# Altium PCB dummy.PcbDoc
Units mil, origin at the board's own origin, x right, y up, seen from the top; angles counter-clockwise.
Board outline 6000 x 4000 mil, 2 copper layers (Top Layer, Bottom Layer); 57 components, 23 nets, 4 pads, 0 vias.
Unrouted connection lines stored in the file: 1.
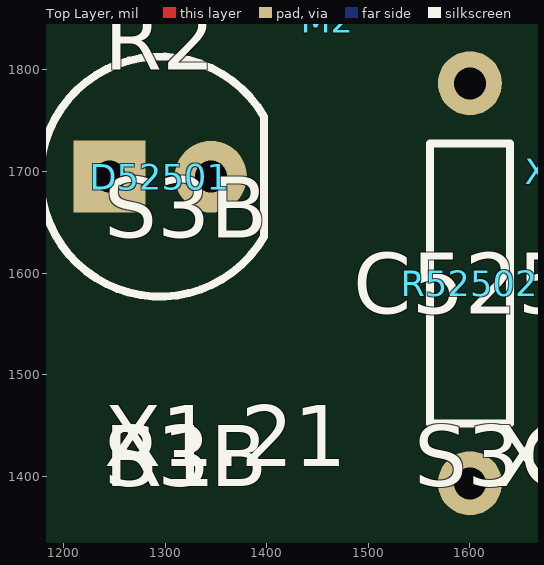
[diagram p0: Top Layer view]
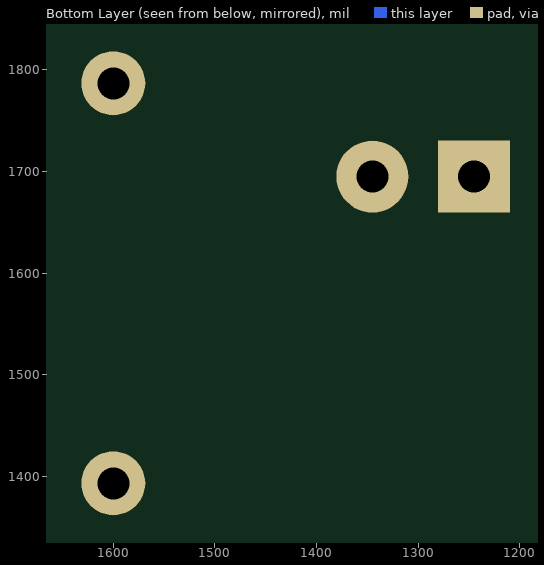
[diagram p1: Bottom Layer view, seen from below]

## Layer stack, top to bottom
Top Solder: solder mask 0.4, Solder Resist, Dk 3.5
Top Layer: signal copper 1.4
Dielectric 1: dielectric 12.6, FR-4, Dk 4.8
Bottom Layer: signal copper 1.4
Bottom Solder: solder mask 0.4, Solder Resist, Dk 3.5

## Board outline
1000,1000 7000,1000 7000,5000 1000,5000

## Design rules (kind name [scope] priority, off if disabled: settings)
Clearance [All] p1: gap=10 ignorepadtopadclearanceinfootprint=FALSE except(0: Arc-Hole Track-Hole SMDPad-Hole THPad-Hole Via-Hole Fill-Hole Poly-Hole Region-Hole Text-Hole)
PolygonConnect [All] p1: connectstyle=Relief reliefconductorwidth=10 reliefentries=4 polygonreliefangle="90 Angle" airgapwidth=10
RoomDefinition TK525_Kraftforsyning [InComponentClass('TK525_Kraftforsyning')] p1: confinementstyle=ConfineIn formatcopy=TRUE lockcomponents=FALSE outline 895,1165 7460,1165 7460,5360 895,5360
RoomDefinition TK525_2 [InComponentClass('TK525_2')] p2: confinementstyle=ConfineIn formatcopy=TRUE lockcomponents=FALSE outline 0,0 7550,0 7550,5565 0,5565
RoomDefinition TK525_1 [InComponentClass('TK525_1')] p3: confinementstyle=ConfineIn formatcopy=TRUE lockcomponents=FALSE outline 0,0 7580,0 7580,5585 0,5585
RoutingVias [All] p1: holewidth=28 width=50 viastyle="Through Hole" minholewidth=28 minwidth=50 maxholewidth=28 maxwidth=50
SolderMaskExpansion [All] p1: expansion=4 istentingtop=FALSE
Width [All] p1: maxlimit=10 minlimit=10 preferedwidth=10
30 further rules are at their usual default settings.

## Classes and differential pairs
component class TK525_Kraftforsyning: F1 K1 K2 K52501 L52500 L52501 M1 M2 M3 M4 M5 M6 M7 M? S1 S2 S3 S4 S4B S5 S5B X1.1 X1.2 X1.3 X1.4 X1.5 X1.6 X1.7 X1.8 X1.11 X1.12 X1.13 X1.14 X1.15 X1.16 X1.17 X1.18
component class TK525_2: C52500 D52500 D52501 L52501 R2 R52502 S3B
component class TK525_1: R1 S3 S3B S3C X1.9 X1.10 X1.19 X1.20 X1.21 X1.22 X1.26 X1.27

## Components (designator, comment, footprint, x,y, rotation, side; value= is the part's Value field where it differs from the comment)
C52500 "MAL209636222E3" dummy 1480,1525 r90 top
D52500 "GBJ2504" dummy 1965,1525 r90 top
D52501 "LED Rød" LED254W7L870D500 1295,1695 r0 top
F1 "Automatsikring" dummy 1705,2185 r90 top
K1 "DIN-Rele 5V" dummy 1480,2185 r90 top
K2 "Kontaktor" dummy 1235,2170 r90 top
K52501 "DIN-Rele 5V" dummy 1930,1950 r90 top
L52501 "Skilletrafo 2:1" dummy 2450,1545 r90 top
M1 "Lask til 2.5mm2 Rekkeklemme 10way" dummy 1235,1865 r90 top
M2 "Lask til 2.5mm2 Rekkeklemme 10way" dummy 1460,1850 r90 top
M3 "Automasjonsbryter holder" dummy 2215,1905 r90 top
M4 "Automasjonsbryter holder" dummy 1480,1905 r90 top
M5 "Automasjonsbryter holder" dummy 1725,1905 r90 top
M6 "Automasjonsbryter holder" dummy 1970,1905 r90 top
M7 "Automasjonsbryter holder" dummy 1235,1905 r90 top
R1 "100R" dummy 1235,1355 r90 top
R2 "100R" dummy 1235,1765 r90 top
R52502 "16k" RESA_0.25W 1600,1590 r90 top
S1 "Automasjonsvelger Grønn" dummy 4045,1920 r90 top
S1 "Automasjonsbryter NO" dummy 4270,1920 r90 top
S2 "Automasjonsbryter NC" dummy 3315,1905 r90 top
S2 "Automasjonsvelger Rød" dummy 3070,1905 r90 top
S3 "Automasjonsbryter NO" dummy 3785,1915 r90 top
S3 "Automasjonsvelger Grønn" dummy 3555,1905 r90 top
S3B "Automasjonsbryter NO" dummy 1235,1355 r90 top
S3B "Automasjonsbryter NC" dummy 1235,1600 r90 top
S3C "Automasjonsbryter NO" dummy 1540,1355 r90 top
S4 "Automasjonsbryter NC" dummy 4495,1905 r90 top
S4 "Automasjonsvelger Nødstopp" dummy 4985,1905 r90 top
S4B "Automasjonsbryter NC" dummy 2460,1845 r90 top
S5 "Automasjonsvelger Vrider bistabil" dummy 5230,1905 r90 top
S5 "Automasjonsbryter NC" dummy 4740,1905 r90 top
S5B "Automasjonsbryter NC" dummy 2765,1845 r90 top
X1.1 "Rekkeklemme 2.5mm2" dummy 4660,1280 r90 top
X1.2 "Rekkeklemme 2.5mm2" dummy 4985,1260 r90 top
X1.3 "Rekkeklemme 2.5mm2" dummy 5330,1260 r90 top
X1.4 "Rekkeklemme 2.5mm2" dummy 5675,1260 r90 top
X1.5 "Rekkeklemme 2.5mm2" dummy 3580,1750 r90 top
X1.6 "Rekkeklemme 2.5mm2" dummy 2840,1750 r90 top
X1.7 "Rekkeklemme 2.5mm2" dummy 2100,1750 r90 top
X1.8 "Rekkeklemme 2.5mm2" dummy 6020,1260 r90 top
X1.9 "Rekkeklemme 2.5mm2" dummy 2835,1415 r90 top
X1.10 "Rekkeklemme 2.5mm2" dummy 3575,1365 r90 top
X1.11 "Rekkeklemme 2.5mm2" dummy 3925,1720 r90 top
X1.12 "Rekkeklemme 2.5mm2" dummy 4295,1700 r90 top
X1.13 "Rekkeklemme 2.5mm2" dummy 4690,1700 r90 top
X1.14 "Rekkeklemme 2.5mm2" dummy 5085,1700 r90 top
X1.15 "Rekkeklemme 2.5mm2" dummy 3185,1700 r90 top
X1.16 "Rekkeklemme 2.5mm2" dummy 2445,1700 r90 top
X1.17 "Rekkeklemme 2.5mm2" dummy 1705,1700 r90 top
X1.18 "Rekkeklemme 2.5mm2" dummy 5480,1700 r90 top
X1.19 "Rekkeklemme 2.5mm2" dummy 3180,1365 r90 top
X1.20 "Rekkeklemme 2.5mm2" dummy 3970,1355 r90 top
X1.21 "Rekkeklemme 2.5mm2" dummy 1235,1375 r90 top
X1.22 "Rekkeklemme 2.5mm2" dummy 2025,1355 r90 top
X1.26 "Rekkeklemme 2.5mm2" dummy 1620,1355 r90 top
X1.27 "Rekkeklemme 2.5mm2" dummy 2430,1355 r90 top

## Footprints (in the part's own frame and the unit in brackets; to place one, negate y for a bottom-side part, rotate by r counter-clockwise, add the part's x,y. Pads: shape width x height; smd on the part's side, far side on the other; paste and mask are expansions set on the pad)
dummy [mil] "Dummy footprint for components that are not on the PCB for BOM to be correct"
LED254W7L870D500 [mm] "5mm LED, 8.7mm høy, 2.54mm pitch"
  rect 1.8x1.8 hole 0.8: 1(-1.27,0)
  round 1.8 hole 0.8: 2(1.27,0)
  silkscreen extent -3,-3 2.6,3, body extent -3,-3 2.5,3, height 8.9
RESA_0.25W [mm]
  round 1.6 hole 0.8: 1(-5,0) 2(5,0)
  silkscreen extent -3.5,-1 3.5,1, body extent -5.4,-1.2 5.4,1.2, height 2.6

## Part data
C52500: library part 3076, "CAP, ALU ELEC, 2200UF, 400V", id=3076, komponenttype=2, leverandor=Farnell, leverandor_varenr=2342176, navn=MAL209636222E3, nokkelord="Capacitor, Kondensator", pakke_opprettet="02/11/2021 00:12:53", pakke_opprettet_av=815, pakketype=TH, pris=340, produsent=Vishay, symbol_opprettet="28/06/2014 15:26:13", symbol_opprettet_av=815
D52500: library part 3322, "diodebro/Likeretterbro 400V 25A", antall=43, dybde=0, hylle=7, id=3322, komponenttype=9, lager_type=Baklager, leverandor=Farnell, leverandor_varenr=1651042, navn=GBJ2504, nokkelord="bro, diodebro, bridge", pakke_opprettet="02/11/2021 00:12:53", pakke_opprettet_av=815, pakketype=TH, pris=16, rad=7, rom=OV, symbol_opprettet="09/06/2015 22:09:39", symbol_opprettet_av=815
D52501: library part 3117, "Farget LED, 5mm", antall=59, dybde=0, hylle=4, id=3117, komponenttype=9, lager_type=Fremlager, navn="LED Rød", nokkelord="LED, rød, red, 5mm, diode, lys, light,  led 5mm", pakke_opprettet="09/02/2016 18:21:00", pakke_opprettet_av=1366, pakketype=-, pris=1, produsent=-, rad=6, rom=OV, symbol_opprettet="06/07/2014 18:59:47", symbol_opprettet_av=815
F1: library part 2977, "2-Pol", id=2977, leverandor=Farnell, leverandor_varenr=2492800, navn=Automatsikring, nokkelord="Sikring, Fuse", pakke_opprettet="02/11/2021 00:12:53", pakke_opprettet_av=815, pakketype=DIN, pris=362, produsent=ABB, symbol_opprettet="05/07/2015 13:21:53", symbol_opprettet_av=815
K1 K52501: library part 3272, "Coil: 5VDC, Contact: 250VAC 6A, DIN mount", id=3272, leverandor=Farnell, leverandor_varenr=1895933, navn="DIN-Rele 5V", pakke_opprettet="02/11/2021 00:12:53", pakke_opprettet_av=815, pakketype=-, pris=310, produsent=ABB, symbol_opprettet="04/07/2015 12:23:41", symbol_opprettet_av=815
K2: library part 2948, "Industriellt rele", id=2948, leverandor=Farnell, leverandor_varenr=9940480, navn=Kontaktor, nokkelord=Contactor, pakke_opprettet="02/11/2021 00:12:53", pakke_opprettet_av=815, pakketype=-, pris=300, produsent=IMO, symbol_opprettet="04/07/2015 12:23:41", symbol_opprettet_av=815
L52501: library part 3842, "Skilletrafo Ringkjerne", antall=40, dybde=0, hylle=2, id=3842, kolonne=4, komponenttype=3, lager_type=Fremlager, leverandor=Farnell, leverandor_varenr=2546942, navn="Skilletrafo 2:1", nokkelord="Trafo, transformer", pakke_opprettet="02/11/2021 00:12:53", pakke_opprettet_av=815, pakketype=-, pris=1900, produsent=Hammond, rad=4, rom=OV, symbol_opprettet="30/04/2016 00:07:18", symbol_opprettet_av=815
M1 M2: library part 3273, "Jumper (Busbar), Cross Jumper, DIN Rail Screw Clamp Terminal Blocks, 10 Ways", id=3273, leverandor=Farnell, leverandor_varenr=2061384, navn="Lask til 2.5mm2 Rekkeklemme 10way", pakke_opprettet="02/11/2021 00:12:53", pakke_opprettet_av=815, pakketype=-, pris=17, produsent=Multicomp, symbol_opprettet="12/03/2017 01:13:28", symbol_opprettet_av=815
M3 M4 M5 M6 M7: library part 6258, "Assembly Hardware, Siemens 3-Way Modules, Holder, SIRIUS ACT 3SU Series", id=6258, leverandor=Farnell, leverandor_varenr=2695729, navn="Automasjonsbryter holder", nokkelord="bryter, switch, tesla", pakke_opprettet="02/11/2021 00:12:53", pakke_opprettet_av=815, pris=34, produsent=Siemens, symbol_opprettet="12/03/2017 01:13:28", symbol_opprettet_av=815
R1 R2: library part 6251, "100 Ohm, 100W Resistor, Solder Lug, Wirewound +-5% 1.9kV", id=6251, komponenttype=1, leverandor=Farnell, leverandor_varenr=1768214, navn=100R, nokkelord="Motstand, resistor, 100, tesla, effekt, effektmotstand, power, lampe", pakke_opprettet="02/11/2021 00:12:53", pakke_opprettet_av=815, pris=250, produsent="TT electronics", symbol_opprettet="08/07/2014 21:16:33", symbol_opprettet_av=815
R52502: library part 3759, "0.25W 1% Generic resistor", antall=99, dybde=1, hylle=5, id=3759, komponenttype=1, lager_type=Fremlager, navn=16k, nokkelord="Motstand, Resistor", pakke_opprettet="28/06/2014 17:13:33", pakke_opprettet_av=815, pakketype=TH, pris=0, rad=7, rom=OV, symbol_opprettet="08/07/2014 21:16:33", symbol_opprettet_av=815
S1 S3: library part 6252, "Switch Actuator, Siemens 22mm Pushbutton Switches", id=6252, leverandor=Farnell, leverandor_varenr=2695623, navn="Automasjonsvelger Grønn", nokkelord="automasjonsbryter, siemens", pakke_opprettet="02/11/2021 00:12:53", pakke_opprettet_av=815, pris=78, produsent=Siemens, symbol_opprettet="01/11/2021 23:43:07", symbol_opprettet_av=815
S1 S3 S3B S3C: library part 6257, "Contact Block, SPST-NO, 10 A, 500 V, 1 Pole, 3SU Series, Screw", id=6257, leverandor=Farnell, leverandor_varenr=2695771, navn="Automasjonsbryter NO", nokkelord="bryter, switch, tesla", pakke_opprettet="02/11/2021 00:12:53", pakke_opprettet_av=815, pris=80, produsent=Siemens, symbol_opprettet="01/11/2021 23:46:02", symbol_opprettet_av=815
S2 S3B S4 S4B S5 S5B: library part 6256, "Contact Block, SPST-NC, 10 A, 500 V, 1 Pole, 3SU Series, Screw", id=6256, leverandor=Farnell, leverandor_varenr=2695772, navn="Automasjonsbryter NC", nokkelord="bryter, switch, tesla", pakke_opprettet="02/11/2021 00:12:53", pakke_opprettet_av=815, pris=80, produsent=Siemens, symbol_opprettet="01/11/2021 23:45:21", symbol_opprettet_av=815
S2: library part 6253, "Switch Actuator, Siemens 22mm Pushbutton Switches", id=6253, leverandor=Farnell, leverandor_varenr=2695622, navn="Automasjonsvelger Rød", nokkelord="automasjonsbryter, siemens", pakke_opprettet="02/11/2021 00:12:53", pakke_opprettet_av=815, pris=78, produsent=Siemens, symbol_opprettet="01/11/2021 23:43:07", symbol_opprettet_av=815
S4: library part 6255, "Switch Actuator, Siemens 22mm Emergency Stop Mushroom Pushbutton Switches", id=6255, leverandor=Farnell, leverandor_varenr=2695631, navn="Automasjonsvelger Nødstopp", nokkelord="automasjonsbryter, siemens", pakke_opprettet="02/11/2021 00:12:53", pakke_opprettet_av=815, pris=355, produsent=Siemens, symbol_opprettet="01/11/2021 23:41:57", symbol_opprettet_av=815
S5: library part 6254, "Switch Actuator, Siemens 22mm Selector Switches", id=6254, leverandor=Farnell, leverandor_varenr=2695653, navn="Automasjonsvelger Vrider bistabil", nokkelord="automasjonsbryter, siemens", pakke_opprettet="02/11/2021 00:12:53", pakke_opprettet_av=815, pris=168, produsent=Siemens, symbol_opprettet="01/11/2021 23:44:13", symbol_opprettet_av=815
X1.1 X1.2 X1.3 X1.4 X1.5 X1.6 X1.7 X1.8 X1.9 X1.10 X1.11 X1.12 X1.13 X1.14 X1.15 X1.16 X1.17 X1.18 X1.19 X1.20 X1.21 X1.22 X1.26 X1.27: library part 3304, "DIN Rail mount terminal block", id=3304, komponenttype=11, leverandor=Farnell, leverandor_varenr=2061376, navn="Rekkeklemme 2.5mm2", nokkelord=CDU2.5, pakke_opprettet="02/11/2021 00:12:53", pakke_opprettet_av=815, pakketype=-, pris=5, produsent=Multicomp, symbol_opprettet="12/03/2017 00:15:42", symbol_opprettet_av=815

## Nets (pads, with @x,y where several pads share a name; then routed paths per layer and width w, separated by ;. In a path a pad name is that pad's centre, name@x,y a point inside that pad or via, vN(x,y) a via of type N, cw(c..) or ccw(c..) an arc to the next point about the centre after c; other vN are vias at no path point)
L1_230VAC: 
NetC52500_1: D52501.2
NetC52500_2: R52502.2
NetD52500_1: 
NetD52500_2: 
NetD52501_1: D52501.1 R52502.1
NetF1_1: 
NetF1_2: 
NetF1_3: 
NetF1_4: 
NetK1_43: 
NetK1_44: 
NetK2_14: 
NetK2_31: 
NetK2_32: 
NetK2_43: 
NetK2_44: 
NetK2_54: 
NetK2_64: 
NetR1_1: 
NetS1_44: 
NetS4_12: 
NetS4B_22: 